# Altium PCB standos_rpi_com.PcbDoc (part 1 of 2)
Units mm, origin at the board's own origin, x right, y up, seen from the top; angles counter-clockwise.
Board outline 197 x 179 mm, 2 copper layers (Top Layer, Bottom Layer); 32 components, 588 nets, 1605 pads, 102 vias.
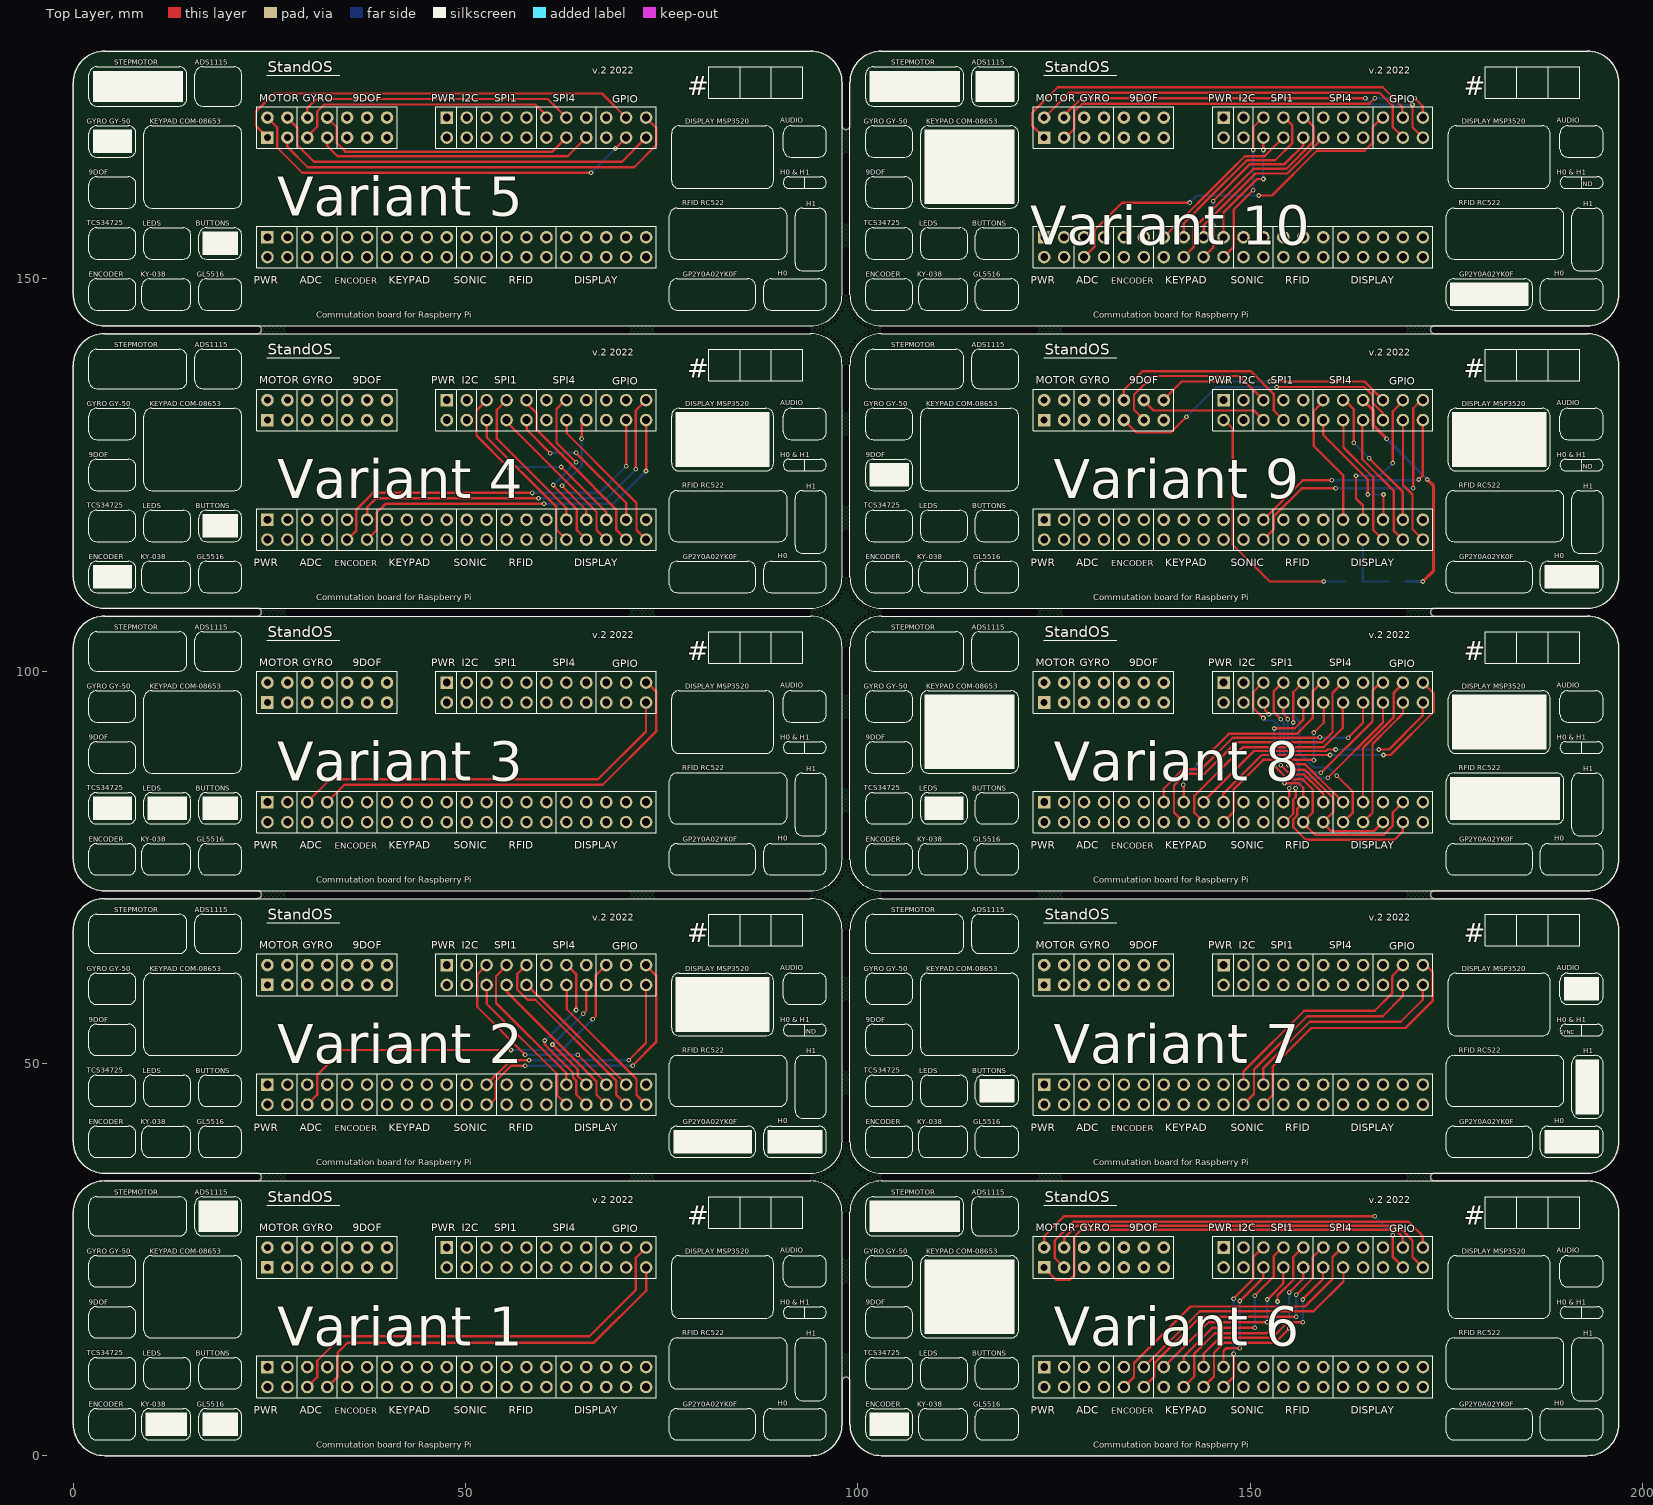
[diagram p0: Top Layer view]
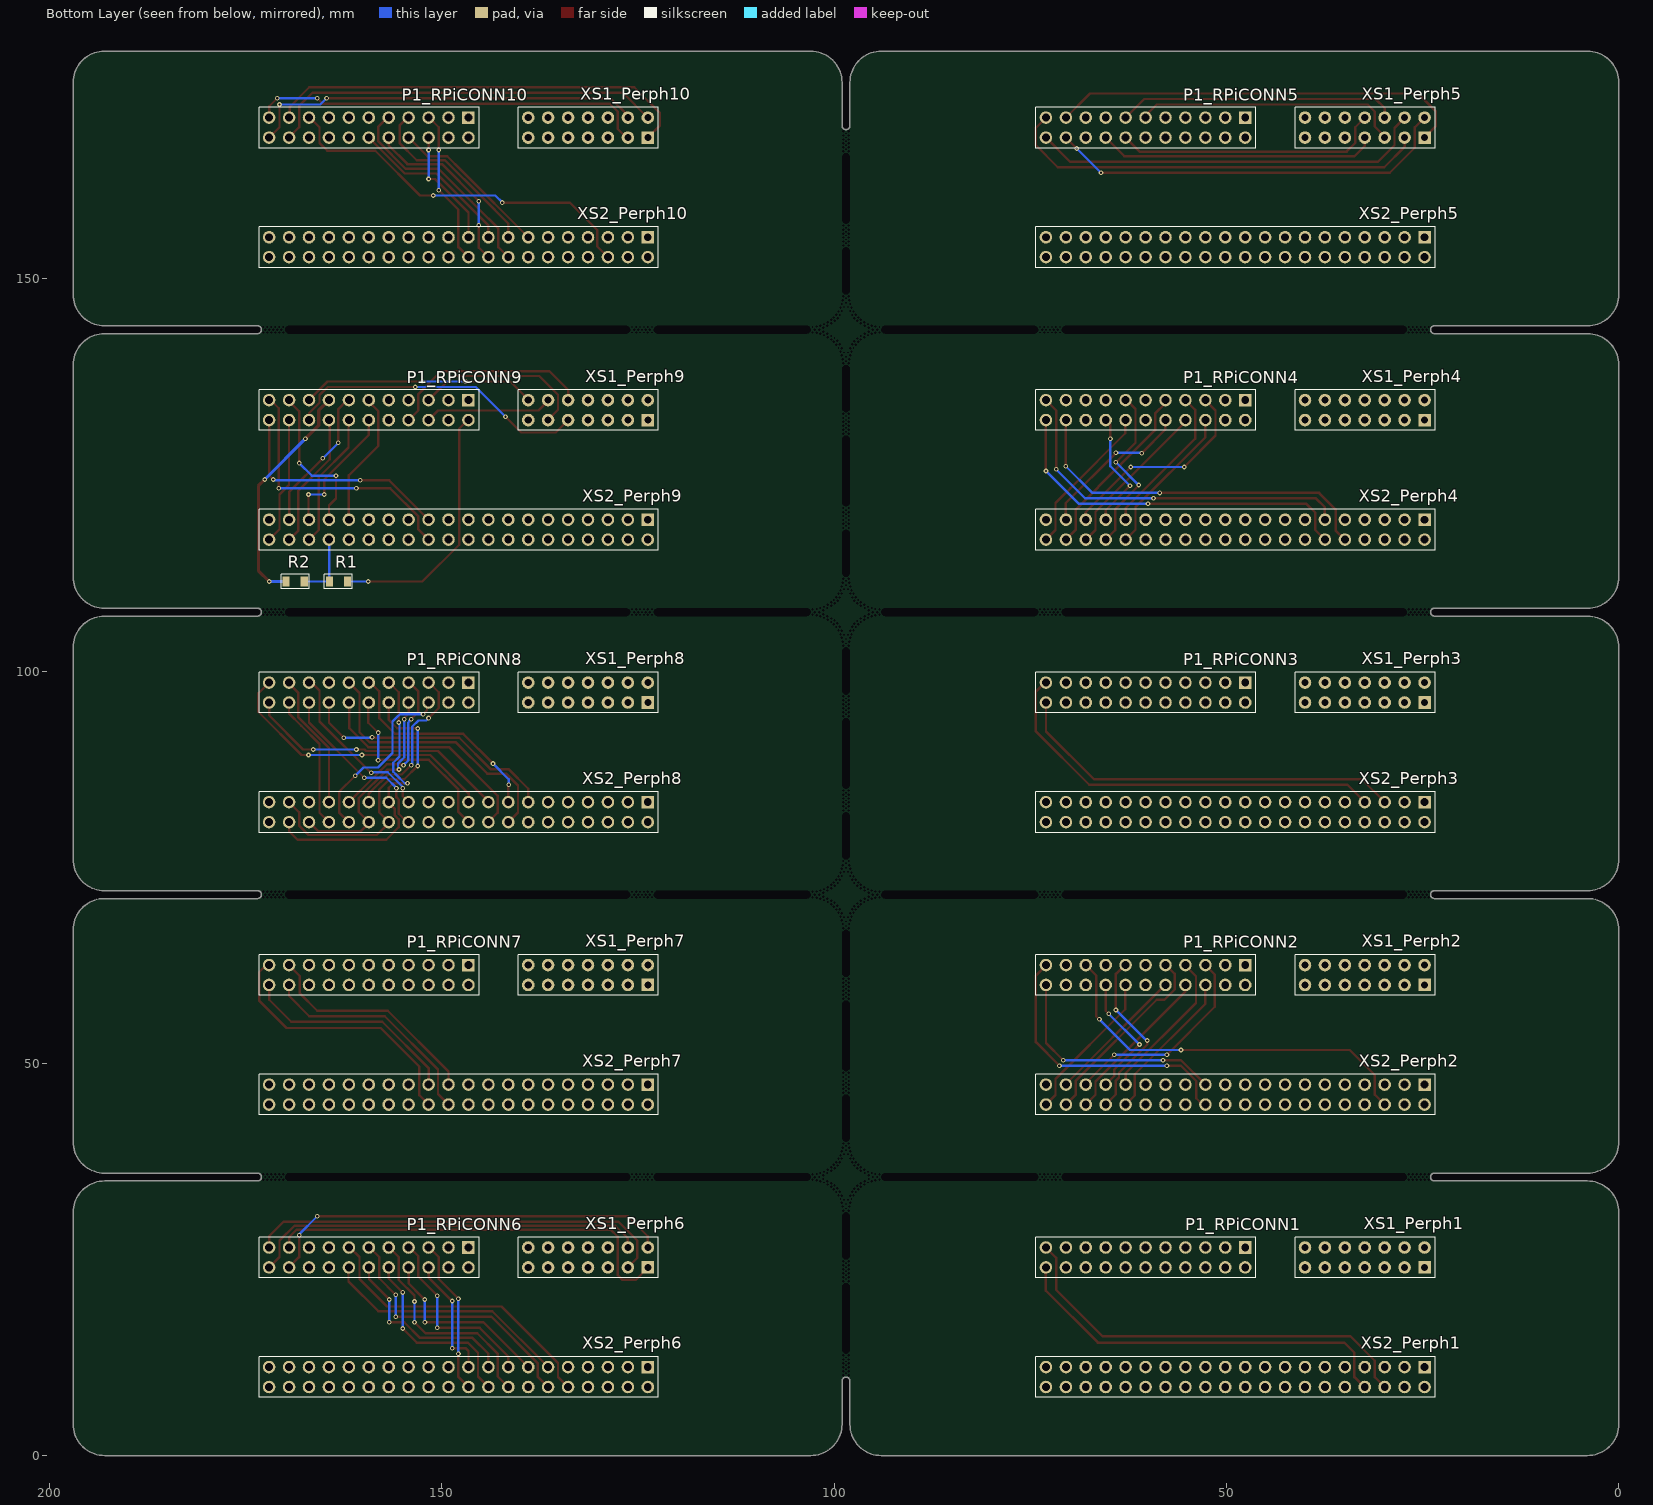
[diagram p1: Bottom Layer view, seen from below]

## Layer stack, top to bottom
Top Solder: solder mask 0.0102, Solder Resist, Dk 3.5
Top Layer: signal copper 0.0356
Dielectric 1: dielectric 0.32, FR-4, Dk 4.8
Bottom Layer: signal copper 0.0356
Bottom Solder: solder mask 0.0102, Solder Resist, Dk 3.5

## Board outline
4,0 cw(c4,4) 0,4 0,31 cw(c4,31) 4,35 23.5,35 ccw(c23.5,35.5) 23.5,36 4,36 cw(c4,40) 0,40 0,67 cw(c4,67) 4,71 23.5,71 ccw(c23.5,71.5) 23.5,72 4,72 cw(c4,76) 0,76 0,103 cw(c4,103) 4,107 23.5,107 ccw(c23.5,107.5) 23.5,108 4,108 cw(c4,112) 0,112 0,139 cw(c4,139) 4,143 23.5,143 ccw(c23.5,143.5) 23.5,144 4,144 cw(c4,148) 0,148 0,175 cw(c4,175) 4,179 94,179 cw(c94,175) 98,175 98,169.5 ccw(c98.5,169.5) 99,169.5 99,175 cw(c103,175) 103,179 193,179 cw(c193,175) 197,175 197,148 cw(c193,148) 193,144 173.5,144 ccw(c173.5,143.5) 173.5,143 193,143 cw(c193,139) 197,139 197,112 cw(c193,112) 193,108 173.5,108 ccw(c173.5,107.5) 173.5,107 193,107 cw(c193,103) 197,103 197,76 cw(c193,76) 193,72 173.5,72 ccw(c173.5,71.5) 173.5,71 193,71 cw(c193,67) 197,67 197,40 cw(c193,40) 193,36 173.5,36 ccw(c173.5,35.5) 173.5,35 193,35 cw(c193,31) 197,31 197,4 cw(c193,4) 193,0 103,0 cw(c103,4) 99,4 99,9.5 ccw(c98.5,9.5) 98,9.5 98,4 cw(c94,4) 94,0

## Design rules (kind name [scope] priority, off if disabled: settings)
Clearance [All] p1: gap=0.2 ignorepadtopadclearanceinfootprint=FALSE except(0: Arc-Hole Track-Hole SMDPad-Hole THPad-Hole Via-Hole Fill-Hole Poly-Hole Region-Hole Text-Hole)
HoleSize [All] p1: absolutevalues=TRUE maxlimit=30 minlimit=0.3 maxpercent=80.000 minpercent=20.000
HoleToHoleClearance [All] p1: gap=0.1 allowstackedmicrovias=TRUE
PolygonConnect [All] p1: connectstyle=Relief reliefconductorwidth=0.254 reliefentries=4 polygonreliefangle="90 Angle" airgapwidth=0.254
RoutingVias [All] p1: holewidth=0.3 width=0.5 viastyle="Through Hole" minholewidth=0.3 minwidth=0.5 maxholewidth=1 maxwidth=1 useviatemplates=TRUE viatemplateguid#1={39C81204-A165-49BB-A1DD-CC813F6DF5A9} viatemplatename#1=v50h30m50
SilkToSilkClearance [All] p1: silktosilkclearance=0.1
SilkToSolderMaskClearance [IsPad] p1: minsilkscreentomaskgap=0.1 clearancetoexposedcopper=TRUE
SolderMaskExpansion [All] p1: expansion=0.102 istentingtop=FALSE
Width [All] p1: maxlimit=2 minlimit=0.2 preferedwidth=0.3 minimp=50.000000 maximp=50.000000 favimp=50.000000
26 further rules are at their usual default settings.

## Classes and differential pairs
component class RPiCONN10: P1_RPiCONN10
component class Perph10: XS1_Perph10 XS2_Perph10
component class "Variant 9": R1 R2
component class RPiCONN9: P1_RPiCONN9
component class RPiCONN8: P1_RPiCONN8
component class RPiCONN7: P1_RPiCONN7
component class RPiCONN6: P1_RPiCONN6
component class RPiCONN5: P1_RPiCONN5
component class RPiCONN4: P1_RPiCONN4
component class Perph9: XS1_Perph9 XS2_Perph9
component class Perph8: XS1_Perph8 XS2_Perph8
component class Perph7: XS1_Perph7 XS2_Perph7
component class Perph6: XS1_Perph6 XS2_Perph6
component class Perph5: XS1_Perph5 XS2_Perph5
component class Perph4: XS1_Perph4 XS2_Perph4
component class RPiCONN3: P1_RPiCONN3
component class RPiCONN1: P1_RPiCONN1
component class RPiCONN2: P1_RPiCONN2
component class Perph3: XS1_Perph3 XS2_Perph3
component class Perph2: XS1_Perph2 XS2_Perph2
channel class RPi_connector: RPiCONN1 RPiCONN2 RPiCONN3 RPiCONN4 RPiCONN5 RPiCONN6 RPiCONN7 RPiCONN8 RPiCONN9
channel class Perph_connectors: Perph1 Perph2 Perph3 Perph4 Perph5 Perph6 Perph7 Perph8 Perph9
component class Perph1: XS1_Perph1 XS2_Perph1

## Components (designator, comment, footprint, x,y, rotation, side; value= is the part's Value field where it differs from the comment)
P1_RPiCONN1 "PLD-22" PLD-22 47.62,26.525 r0 bottom (schematic designator P1)
P1_RPiCONN2 "PLD-22" PLD-22 47.62,62.525 r0 bottom (schematic designator P1)
P1_RPiCONN3 "PLD-22" PLD-22 47.62,98.525 r0 bottom (schematic designator P1)
P1_RPiCONN4 "PLD-22" PLD-22 47.62,134.525 r0 bottom (schematic designator P1)
P1_RPiCONN5 "PLD-22" PLD-22 47.62,170.525 r0 bottom (schematic designator P1)
P1_RPiCONN6 "PLD-22" PLD-22 146.62,26.525 r0 bottom (schematic designator P1)
P1_RPiCONN7 "PLD-22" PLD-22 146.62,62.525 r0 bottom (schematic designator P1)
P1_RPiCONN8 "PLD-22" PLD-22 146.62,98.525 r0 bottom (schematic designator P1)
P1_RPiCONN9 "PLD-22" PLD-22 146.62,134.525 r0 bottom (schematic designator P1)
P1_RPiCONN10 "PLD-22" PLD-22 146.62,170.525 r0 bottom (schematic designator P1)
R1 "R0805" R0805 163.2,111.4 r0 bottom value=10K
R2 "R0805" R0805 168.7,111.4 r0 bottom value=NC
XS1_Perph1 "PLD-14" PBD-14 24.76,26.525 r0 bottom (schematic designator XS1)
XS1_Perph2 "PLD-14" PBD-14 24.76,62.525 r0 bottom (schematic designator XS1)
XS1_Perph3 "PLD-14" PBD-14 24.76,98.525 r0 bottom (schematic designator XS1)
XS1_Perph4 "PLD-14" PBD-14 24.76,134.525 r0 bottom (schematic designator XS1)
XS1_Perph5 "PLD-14" PBD-14 24.76,170.525 r0 bottom (schematic designator XS1)
XS1_Perph6 "PLD-14" PBD-14 123.76,26.525 r0 bottom (schematic designator XS1)
XS1_Perph7 "PLD-14" PBD-14 123.76,62.525 r0 bottom (schematic designator XS1)
XS1_Perph8 "PLD-14" PBD-14 123.76,98.525 r0 bottom (schematic designator XS1)
XS1_Perph9 "PLD-14" PBD-14 123.76,134.525 r0 bottom (schematic designator XS1)
XS1_Perph10 "PLD-14" PBD-14 123.76,170.525 r0 bottom (schematic designator XS1)
XS2_Perph1 "PLD-40" PLD-40 24.76,11.285 r0 bottom (schematic designator XS2)
XS2_Perph2 "PLD-40" PLD-40 24.76,47.285 r0 bottom (schematic designator XS2)
XS2_Perph3 "PLD-40" PLD-40 24.76,83.285 r0 bottom (schematic designator XS2)
XS2_Perph4 "PLD-40" PLD-40 24.76,119.285 r0 bottom (schematic designator XS2)
XS2_Perph5 "PLD-40" PLD-40 24.76,155.285 r0 bottom (schematic designator XS2)
XS2_Perph6 "PLD-40" PLD-40 123.76,11.285 r0 bottom (schematic designator XS2)
XS2_Perph7 "PLD-40" PLD-40 123.76,47.285 r0 bottom (schematic designator XS2)
XS2_Perph8 "PLD-40" PLD-40 123.76,83.285 r0 bottom (schematic designator XS2)
XS2_Perph9 "PLD-40" PLD-40 123.76,119.285 r0 bottom (schematic designator XS2)
XS2_Perph10 "PLD-40" PLD-40 123.76,155.285 r0 bottom (schematic designator XS2)

## Footprints (in the part's own frame and the unit in brackets; to place one, negate y for a bottom-side part, rotate by r counter-clockwise, add the part's x,y. Pads: shape width x height; smd on the part's side, far side on the other; paste and mask are expansions set on the pad)
PBD-14 [mm]
  rect 1.6x1.6 hole 0.9: 1(0,2.54)
  round 1.6 hole 0.9: 2(0,0) 3(2.54,2.54) 4(2.54,0) 5(5.08,2.54) 6(5.08,0) 7(7.62,2.54) 8(7.62,0) 9(10.16,2.54) 10(10.16,0) 11(12.7,2.54) 12(12.7,0) 13(15.24,2.54) 14(15.24,0)
  silkscreen extent -1.36,-1.33 16.51,3.87, body extent -1.27,-1.23 16.51,3.85, height 8.4
PLD-22 [mm]
  rect 1.6x1.6 hole 1: 1(0,0)
  round 1.6 hole 1: 2(0,2.54) 3(2.54,0) 4(2.54,2.54) 5(5.08,0) 6(5.08,2.54) 7(7.62,0) 8(7.62,2.54) 9(10.16,0) 10(10.16,2.54) 11(12.7,0) 12(12.7,2.54) 13(15.24,0) 14(15.24,2.54) 15(17.78,0) 16(17.78,2.54) 17(20.32,0) 18(20.32,2.54) 19(22.86,0) 20(22.86,2.54) 21(25.4,0) 22(25.4,2.54)
  silkscreen extent -1.36,-1.33 26.67,3.87, body extent -1.29,-1.26 26.65,3.82, height 8.54
PLD-40 [mm]
  rect 1.6x1.6 hole 1: 1(0,0)
  round 1.6 hole 1: 2(0,2.54) 3(2.54,0) 4(2.54,2.54) 5(5.08,0) 6(5.08,2.54) 7(7.62,0) 8(7.62,2.54) 9(10.16,0) 10(10.16,2.54) 11(12.7,0) 12(12.7,2.54) 13(15.24,0) 14(15.24,2.54) 15(17.78,0) 16(17.78,2.54) 17(20.32,0) 18(20.32,2.54) 19(22.86,0) 20(22.86,2.54) 21(25.4,0) 22(25.4,2.54) 23(27.94,0) 24(27.94,2.54) 25(30.48,0) 26(30.48,2.54) 27(33.02,0) 28(33.02,2.54) 29(35.56,0) 30(35.56,2.54) 31(38.1,0) 32(38.1,2.54) 33(40.64,0) 34(40.64,2.54) 35(43.18,0) 36(43.18,2.54) 37(45.72,0) 38(45.72,2.54) 39(48.26,0) 40(48.26,2.54)
  silkscreen extent -1.36,-1.33 49.55,3.87, body extent -1.29,-1.26 49.51,3.82, height 8.54
R0805 [mm]
  rect 0.9x1.3 smd: 1(-1.15,0) 2(1.15,0)
  silkscreen extent -1.8,-0.9 1.8,0.9, body extent -1.4,-0.62 1.4,0.63, height 0.8

## Free pads (board coordinates)
  round 0 hole 1 slot 44 at 0 deg unplated: 17(49,35.5) 17(49,71.5) 17(49,107.5) 17(49,143.5) 17(148,35.5) 17(148,71.5) 17(148,107.5) 17(148,143.5)
  round 0 hole 1 slot 20 at 0 deg unplated: 17(84,35.5) 17(84,71.5) 17(84,107.5) 17(84,143.5) 17(113,35.5) 17(113,71.5) 17(113,107.5) 17(113,143.5)
  round 0 hole 1 slot 9 at 90 deg unplated: 17(98.5,17.5) 17(98.5,53.5) 17(98.5,89.5) 17(98.5,125.5) 17(98.5,161.5)
  round 0 hole 1 slot 6 at 90 deg unplated: 17(98.5,28) 17(98.5,43) 17(98.5,64) 17(98.5,79) 17(98.5,100) 17(98.5,115) 17(98.5,136) 17(98.5,151)
  round 0 hole 0.3 unplated mask+0.102: ""(24.225,35.15) ""(24.225,35.85) ""(24.225,71.15) ""(24.225,71.85) ""(24.225,107.15) ""(24.225,107.85) ""(24.225,143.15) ""(24.225,143.85) ""(24.5,35.501) ""(24.5,71.501) ""(24.5,107.501) ""(24.5,143.501) ""(24.75,35.15) ""(24.75,35.85) ""(24.75,71.15) ""(24.75,71.85) ""(24.75,107.15) ""(24.75,107.85) ""(24.75,143.15) ""(24.75,143.85) ""(25,35.501) ""(25,71.501) ""(25,107.501) ""(25,143.501) ""(25.25,35.15) ""(25.25,35.85) ""(25.25,71.15) ""(25.25,71.85) ""(25.25,107.15) ""(25.25,107.85) ""(25.25,143.15) ""(25.25,143.85) ""(25.5,35.501) ""(25.5,71.501) ""(25.5,107.501) ""(25.5,143.501) ""(25.75,35.15) ""(25.75,35.85) ""(25.75,71.15) ""(25.75,71.85) ""(25.75,107.15) ""(25.75,107.85) ""(25.75,143.15) ""(25.75,143.85) ""(26,35.501) ""(26,71.501) ""(26,107.501) ""(26,143.501) ""(26.25,35.15) ""(26.25,35.85) ""(26.25,71.15) ""(26.25,71.85) ""(26.25,107.15) ""(26.25,107.85) ""(26.25,143.15) ""(26.25,143.85) ""(26.5,35.501) ""(26.5,71.501) ""(26.5,107.501) ""(26.5,143.501) ""(26.775,35.15) ""(26.775,35.85) ""(26.775,71.15) ""(26.775,71.85) ""(26.775,107.15) ""(26.775,107.85) ""(26.775,143.15) ""(26.775,143.85) ""(71.225,35.15) ""(71.225,35.85) ""(71.225,71.15) ""(71.225,71.85) ""(71.225,107.15) ""(71.225,107.85) ""(71.225,143.15) ""(71.225,143.85) ""(71.5,35.501) ""(71.5,71.501) ""(71.5,107.501) ""(71.5,143.501) ""(71.75,35.15) ""(71.75,35.85) ""(71.75,71.15) ""(71.75,71.85) ""(71.75,107.15) ""(71.75,107.85) ""(71.75,143.15) ""(71.75,143.85) ""(72,35.501) ""(72,71.501) ""(72,107.501) ""(72,143.501) ""(72.25,35.15) ""(72.25,35.85) ""(72.25,71.15) ""(72.25,71.85) ""(72.25,107.15) ""(72.25,107.85) ""(72.25,143.15) ""(72.25,143.85) ""(72.5,35.501) ""(72.5,71.501) ""(72.5,107.501) ""(72.5,143.501) ""(72.75,35.15) ""(72.75,35.85) ""(72.75,71.15) ""(72.75,71.85) ""(72.75,107.15) ""(72.75,107.85) ""(72.75,143.15) ""(72.75,143.85) ""(73,35.501) ""(73,71.501) ""(73,107.501) ""(73,143.501) ""(73.25,35.15) ""(73.25,35.85) ""(73.25,71.15) ""(73.25,71.85) ""(73.25,107.15) ""(73.25,107.85) ""(73.25,143.15) ""(73.25,143.85) ""(73.5,35.501) ""(73.5,71.501) ""(73.5,107.501) ""(73.5,143.501) ""(73.775,35.15) ""(73.775,35.85) ""(73.775,71.15) ""(73.775,71.85) ""(73.775,107.15) ""(73.775,107.85) ""(73.775,143.15) ""(73.775,143.85) ""(94.225,35.15) ""(94.225,35.85) ""(94.225,71.15) ""(94.225,71.85) ""(94.225,107.15) ""(94.225,107.85) ""(94.225,143.15) ""(94.225,143.85) ""(94.5,35.501) ""(94.5,71.501) ""(94.5,107.501) ""(94.5,143.501) ""(94.75,35.1) ""(94.75,35.9) ""(94.75,71.1) ""(94.75,71.9) ""(94.75,107.1) ""(94.75,107.9) ""(94.75,143.1) ""(94.75,143.9) ""(95.075,35.5) ""(95.075,71.5) ""(95.075,107.5) ""(95.075,143.5) ""(95.225,34.975) ""(95.225,36.025) ""(95.225,70.975) ""(95.225,72.025) ""(95.225,106.975) ""(95.225,108.025) ""(95.225,142.975) ""(95.225,144.025) ""(95.6,35.25) ""(95.6,35.75) ""(95.6,71.25) ""(95.6,71.75) ""(95.6,107.25) ""(95.6,107.75) ""(95.6,143.25) ""(95.6,143.75) ""(95.7,34.8) ""(95.7,36.2) ""(95.7,70.8) ""(95.7,72.2) ""(95.7,106.8) ""(95.7,108.2) ""(95.7,142.8) ""(95.7,144.2) ""(96.125,34.975) ""(96.125,36.025) ""(96.125,70.975) ""(96.125,72.025) ""(96.125,106.975) ""(96.125,108.025) ""(96.125,142.975) ""(96.125,144.025) ""(96.175,34.55) ""(96.175,36.45) ""(96.175,70.55) ""(96.175,72.45) ""(96.175,106.55) ""(96.175,108.45) ""(96.175,142.55) ""(96.175,144.45) ""(96.6,34.25) ""(96.6,36.75) ""(96.6,70.25) ""(96.6,70.25) ""(96.6,72.75) ""(96.6,106.25) ""(96.6,108.75) ""(96.6,142.25) ""(96.6,142.25) ""(96.6,144.75) ""(96.625,34.7) ""(96.625,36.3) ""(96.625,70.7) ""(96.625,72.3) ""(96.625,106.7) ""(96.625,108.3) ""(96.625,142.7) ""(96.625,144.3) ""(96.95,33.95) ""(96.95,37.05) ""(96.95,69.95) ""(96.95,73.05) ""(96.95,105.95) ""(96.95,109.05) ""(96.95,141.95) ""(96.95,145.05) ""(97.075,34.375) ""(97.075,36.625) ""(97.075,70.375) ""(97.075,72.625) ""(97.075,106.375) ""(97.075,108.625) ""(97.075,142.375) ""(97.075,144.625) ""(97.25,33.6) ""(97.25,37.4) ""(97.25,69.6) ""(97.25,73.4) ""(97.25,105.6) ""(97.25,109.4) ""(97.25,141.6) ""(97.25,145.4) ""(97.45,34.025) ""(97.45,36.975) ""(97.45,70.025) ""(97.45,72.975) ""(97.45,106.025) ""(97.45,108.975) ""(97.45,142.025) ""(97.45,144.975) ""(97.55,33.175) ""(97.55,37.825) ""(97.55,69.175) ""(97.55,73.825) ""(97.55,105.175) ""(97.55,109.825) ""(97.55,141.175) ""(97.55,145.825) ""(97.7,33.625) ""(97.7,37.375) ""(97.7,69.625) ""(97.7,73.375) ""(97.7,105.625) ""(97.7,109.375) ""(97.7,141.625) ""(97.7,145.375) ""(97.8,32.7) ""(97.8,38.3) ""(97.8,68.7) ""(97.8,74.3) ""(97.8,104.7) ""(97.8,110.3) ""(97.8,140.7) ""(97.8,146.3) ""(97.975,32.225) ""(97.975,33.125) ""(97.975,37.875) ""(97.975,38.775) ""(97.975,68.225) ""(97.975,69.125) ""(97.975,73.875) ""(97.975,74.775) ""(97.975,104.225) ""(97.975,105.125) ""(97.975,109.875) ""(97.975,110.775) ""(97.975,140.225) ""(97.975,141.125) ""(97.975,145.875) ""(97.975,146.775) ""(98.1,31.75) ""(98.1,39.25) ""(98.1,67.75) ""(98.1,75.25) ""(98.1,103.75) ""(98.1,111.25) ""(98.1,139.75) ""(98.1,147.25) ""(98.15,10.225) ""(98.15,10.75) ""(98.15,11.25) ""(98.15,11.75) ""(98.15,12.25) ""(98.15,12.775) ""(98.15,22.225) ""(98.15,22.75) ""(98.15,23.25) ""(98.15,23.75) ""(98.15,24.25) ""(98.15,24.775) ""(98.15,31.225) ""(98.15,39.775) ""(98.15,46.225) ""(98.15,46.75) ""(98.15,47.25) ""(98.15,47.75) ""(98.15,48.25) ""(98.15,48.775) ""(98.15,58.225) ""(98.15,58.75) ""(98.15,59.25) ""(98.15,59.75) ""(98.15,60.25) ""(98.15,60.775) ""(98.15,67.225) ""(98.15,75.775) ""(98.15,82.225) ""(98.15,82.75) ""(98.15,83.25) ""(98.15,83.75) ""(98.15,84.25) ""(98.15,84.775) ""(98.15,94.225) ""(98.15,94.75) ""(98.15,95.25) ""(98.15,95.75) ""(98.15,96.25) ""(98.15,96.775) ""(98.15,103.225) ""(98.15,111.775) ""(98.15,118.225) ""(98.15,118.75) ""(98.15,119.25) ""(98.15,119.75) ""(98.15,120.25) ""(98.15,120.775) ""(98.15,130.225) ""(98.15,130.75) ""(98.15,131.25) ""(98.15,131.75) ""(98.15,132.25) ""(98.15,132.775) ""(98.15,139.225) ""(98.15,147.775) ""(98.15,154.225) ""(98.15,154.75) ""(98.15,155.25) ""(98.15,155.75) ""(98.15,156.25) ""(98.15,156.775) ""(98.15,166.225) ""(98.15,166.75) ""(98.15,167.25) ""(98.15,167.75) ""(98.15,168.25) ""(98.15,168.775) ""(98.25,32.6) ""(98.25,38.4) ""(98.25,68.6) ""(98.25,74.4) ""(98.25,104.6) ""(98.25,110.4) ""(98.25,140.6) ""(98.25,146.4) ""(98.499,10.5) ""(98.499,11) ""(98.499,11.5) ""(98.499,12) ""(98.499,12.5) ""(98.499,22.5) ""(98.499,23) ""(98.499,23.5) ""(98.499,24) ""(98.499,24.5) ""(98.499,31.5) ""(98.499,39.5) ""(98.499,46.5) ""(98.499,47) ""(98.499,47.5) ""(98.499,48) ""(98.499,48.5) ""(98.499,58.5) ""(98.499,59) ""(98.499,59.5) ""(98.499,60) ""(98.499,60.5) ""(98.499,67.5) ""(98.499,75.5) ""(98.499,82.5) ""(98.499,83) ""(98.499,83.5) ""(98.499,84) ""(98.499,84.5) ""(98.499,94.5) ""(98.499,95) ""(98.499,95.5) ""(98.499,96) ""(98.499,96.5) ""(98.499,103.5) ""(98.499,111.5) ""(98.499,118.5) ""(98.499,119) ""(98.499,119.5) ""(98.499,120) ""(98.499,120.5) ""(98.499,130.5) ""(98.499,131) ""(98.499,131.5) ""(98.499,132) ""(98.499,132.5) ""(98.499,139.5) ""(98.499,147.5) ""(98.499,154.5) ""(98.499,155) ""(98.499,155.5) ""(98.499,156) ""(98.499,156.5) ""(98.499,166.5) ""(98.499,167) ""(98.499,167.5) ""(98.499,168) ""(98.499,168.5) ""(98.5,32.075) ""(98.5,38.925) ""(98.5,68.075) ""(98.5,74.925) ""(98.5,104.075) ""(98.5,110.925) ""(98.5,140.075) ""(98.5,146.925) ""(98.75,32.6) ""(98.75,38.4) ""(98.75,68.6) ""(98.75,74.4) ""(98.75,104.6) ""(98.75,110.4) ""(98.75,140.6) ""(98.75,146.4) ""(98.85,10.225) ""(98.85,10.75) ""(98.85,11.25) ""(98.85,11.75) ""(98.85,12.25) ""(98.85,12.775) ""(98.85,22.225) ""(98.85,22.75) ""(98.85,23.25) ""(98.85,23.75) ""(98.85,24.25) ""(98.85,24.775) ""(98.85,46.225) ""(98.85,46.75) ""(98.85,47.25) ""(98.85,47.75) ""(98.85,48.25) ""(98.85,48.775) ""(98.85,58.225) ""(98.85,58.75) ""(98.85,59.25) ""(98.85,59.75) ""(98.85,60.25) ""(98.85,60.775) ""(98.85,82.225) ""(98.85,82.75) ""(98.85,83.25) ""(98.85,83.75) ""(98.85,84.25) ""(98.85,84.775) ""(98.85,94.225) ""(98.85,94.75) ""(98.85,95.25) ""(98.85,95.75) ""(98.85,96.25) ""(98.85,96.775) ""(98.85,118.225) ""(98.85,118.75) ""(98.85,119.25) ""(98.85,119.75) ""(98.85,120.25) ""(98.85,120.775) ""(98.85,130.225) ""(98.85,130.75) ""(98.85,131.25) ""(98.85,131.75) ""(98.85,132.25) ""(98.85,132.775) ""(98.85,154.225) ""(98.85,154.75) ""(98.85,155.25) ""(98.85,155.75) ""(98.85,156.25) ""(98.85,156.775) ""(98.85,166.225) ""(98.85,166.75) ""(98.85,167.25) ""(98.85,167.75) ""(98.85,168.25) ""(98.85,168.775) ""(98.85,31.225) ""(98.85,39.775) ""(98.85,67.225) ""(98.85,75.775) ""(98.85,103.225) ""(98.85,111.775) ""(98.85,139.225) ""(98.85,147.775) ""(98.9,31.75) ""(98.9,39.25) ""(98.9,67.75) ""(98.9,75.25) ""(98.9,103.75) ""(98.9,111.25) ""(98.9,139.75) ""(98.9,147.25) ""(99.025,32.225) ""(99.025,33.125) ""(99.025,37.875) ""(99.025,38.775) ""(99.025,68.225) ""(99.025,69.125) ""(99.025,73.875) ""(99.025,74.775) ""(99.025,104.225) ""(99.025,105.125) ""(99.025,109.875) ""(99.025,110.775) ""(99.025,140.225) ""(99.025,141.125) ""(99.025,145.875) ""(99.025,146.775) ""(99.2,32.7) ""(99.2,38.3) ""(99.2,68.7) ""(99.2,74.3) ""(99.2,104.7) ""(99.2,110.3) ""(99.2,140.7) ""(99.2,146.3) ""(99.3,33.625) ""(99.3,37.375) ""(99.3,69.625) ""(99.3,73.375) ""(99.3,105.625) ""(99.3,109.375) ""(99.3,141.625) ""(99.3,145.375) ""(99.45,33.175) ""(99.45,37.825) ""(99.45,69.175) ""(99.45,73.825) ""(99.45,105.175) ""(99.45,109.825) ""(99.45,141.175) ""(99.45,145.825) ""(99.55,36.975) ""(99.55,72.975) ""(99.55,108.975) ""(99.55,144.975) ""(99.625,34.075) ""(99.625,70.075) ""(99.625,106.075) ""(99.625,142.075) ""(99.75,33.6) ""(99.75,37.4) ""(99.75,69.6) ""(99.75,73.4) ""(99.75,105.6) ""(99.75,109.4) ""(99.75,141.6) ""(99.75,145.4) ""(99.925,36.625) ""(99.925,72.625) ""(99.925,108.625) ""(99.925,144.625) ""(99.975,34.45) ""(99.975,70.45) ""(99.975,106.45) ""(99.975,142.45) ""(100.05,33.95) ""(100.05,37.05) ""(100.05,69.95) ""(100.05,73.05) ""(100.05,105.95) ""(100.05,109.05) ""(100.05,141.95) ""(100.05,145.05) ""(100.375,36.3) ""(100.375,72.3) ""(100.375,108.3) ""(100.375,144.3) ""(100.375,34.7) ""(100.375,70.7) ""(100.375,106.7) ""(100.375,142.7) ""(100.4,36.75) ""(100.4,72.75) ""(100.4,108.75) ""(100.4,144.75) ""(100.4,34.25) ""(100.4,70.25) ""(100.4,106.25) ""(100.4,142.25) ""(100.825,36.45) ""(100.825,72.45) ""(100.825,108.45) ""(100.825,144.45) ""(100.825,34.55) ""(100.825,70.55) ""(100.825,106.55) ""(100.825,142.55) ""(100.875,36.025) ""(100.875,72.025) ""(100.875,108.025) ""(100.875,144.025) ""(100.875,34.975) ""(100.875,70.975) ""(100.875,106.975) ""(100.875,142.975) ""(101.3,36.2) ""(101.3,72.2) ""(101.3,108.2) ""(101.3,144.2) ""(101.3,34.8) ""(101.3,70.8) ""(101.3,106.8) ""(101.3,142.8) ""(101.4,35.75) ""(101.4,71.75) ""(101.4,107.75) ""(101.4,143.75) ""(101.4,35.25) ""(101.4,71.25) ""(101.4,107.25) ""(101.4,143.25) ""(101.775,36.025) ""(101.775,72.025) ""(101.775,108.025) ""(101.775,144.025) ""(101.775,34.975) ""(101.775,70.975) ""(101.775,106.975) ""(101.775,142.975) ""(101.925,35.5) ""(101.925,71.5) ""(101.925,107.5) ""(101.925,143.5) ""(102.25,35.9) ""(102.25,71.9) ""(102.25,107.9) ""(102.25,143.9) ""(102.25,35.1) ""(102.25,71.1) ""(102.25,107.1) ""(102.25,143.1) ""(102.5,35.499) ""(102.5,71.499) ""(102.5,107.499) ""(102.5,143.499) ""(102.775,35.85) ""(102.775,71.85) ""(102.775,107.85) ""(102.775,143.85) ""(102.775,35.15) ""(102.775,71.15) ""(102.775,107.15) ""(102.775,143.15) ""(123.225,35.15) ""(123.225,35.85) ""(123.225,71.15) ""(123.225,71.85) ""(123.225,107.15) ""(123.225,107.85) ""(123.225,143.15) ""(123.225,143.85) ""(123.5,35.501) ""(123.5,71.501) ""(123.5,107.501) ""(123.5,143.501) ""(123.75,35.15) ""(123.75,35.85) ""(123.75,71.15) ""(123.75,71.85) ""(123.75,107.15) ""(123.75,107.85) ""(123.75,143.15) ""(123.75,143.85) ""(124,35.501) ""(124,71.501) ""(124,107.501) ""(124,143.501) ""(124.25,35.15) ""(124.25,35.85) ""(124.25,71.15) ""(124.25,71.85) ""(124.25,107.15) ""(124.25,107.85) ""(124.25,143.15) ""(124.25,143.85) ""(124.5,35.501) ""(124.5,71.501) ""(124.5,107.501) ""(124.5,143.501) ""(124.75,35.15) ""(124.75,35.85) ""(124.75,71.15) ""(124.75,71.85) ""(124.75,107.15) ""(124.75,107.85) ""(124.75,143.15) ""(124.75,143.85) ""(125,35.501) ""(125,71.501) ""(125,107.501) ""(125,143.501) ""(125.25,35.15) ""(125.25,35.85) ""(125.25,71.15) ""(125.25,71.85) ""(125.25,107.15) ""(125.25,107.85) ""(125.25,143.15) ""(125.25,143.85) ""(125.5,35.501) ""(125.5,71.501) ""(125.5,107.501) ""(125.5,143.501) ""(125.775,35.15) ""(125.775,35.85) ""(125.775,71.15) ""(125.775,71.85) ""(125.775,107.15) ""(125.775,107.85) ""(125.775,143.15) ""(125.775,143.85) ""(170.225,35.15) ""(170.225,35.85) ""(170.225,71.15) ""(170.225,71.85) ""(170.225,107.15) ""(170.225,107.85) ""(170.225,143.15) ""(170.225,143.85) ""(170.5,35.501) ""(170.5,71.501) ""(170.5,107.501) ""(170.5,143.501) ""(170.75,35.15) ""(170.75,35.85) ""(170.75,71.15) ""(170.75,71.85) ""(170.75,107.15) ""(170.75,107.85) ""(170.75,143.15) ""(170.75,143.85) ""(171,35.501) ""(171,71.501) ""(171,107.501) ""(171,143.501) ""(171.25,35.15) ""(171.25,35.85) ""(171.25,71.15) ""(171.25,71.85) ""(171.25,107.15) ""(171.25,107.85) ""(171.25,143.15) ""(171.25,143.85) ""(171.5,35.501) ""(171.5,71.501) ""(171.5,107.501) ""(171.5,143.501) ""(171.75,35.15) ""(171.75,35.85) ""(171.75,71.15) ""(171.75,71.85) ""(171.75,107.15) ""(171.75,107.85) ""(171.75,143.15) ""(171.75,143.85) ""(172,35.501) ""(172,71.501) ""(172,107.501) ""(172,143.501) ""(172.25,35.15) ""(172.25,35.85) ""(172.25,71.15) ""(172.25,71.85) ""(172.25,107.15) ""(172.25,107.85) ""(172.25,143.15) ""(172.25,143.85) ""(172.5,35.501) ""(172.5,71.501) ""(172.5,107.501) ""(172.5,143.501) ""(172.775,35.15) ""(172.775,35.85) ""(172.775,71.15) ""(172.775,71.85) ""(172.775,107.15) ""(172.775,107.85) ""(172.775,143.15) ""(172.775,143.85)

## Via types
v1: diameter 0.6, hole 0.3, Top Layer to Bottom Layer, 102 vias

## Nets (pads, with @x,y where several pads share a name; then routed paths per layer and width w, separated by ;. In a path a pad name is that pad's centre, name@x,y a point inside that pad or via, vN(x,y) a via of type N, cw(c..) or ccw(c..) an arc to the next point about the centre after c; other vN are vias at no path point)
3V3?: P1_RPiCONN9.2 R1.1 | length 32.7
  Top Layer w0.3: P1_RPiCONN9.2@146.6,132.1 147.8,130.9 147.8,116.1 152.5,111.4 v1(159.4,111.4)
  Bottom Layer w0.3: v1(159.4,111.4) R1.1@162.05,111.4
9DOF.GYR.INT_Perph1: XS1_Perph1.9
9DOF.GYR.INT_Perph2: XS1_Perph2.9
9DOF.GYR.INT_Perph3: XS1_Perph3.9
9DOF.GYR.INT_Perph4: XS1_Perph4.9
9DOF.GYR.INT_Perph5: XS1_Perph5.9
9DOF.GYR.INT_Perph6: XS1_Perph6.9
9DOF.GYR.INT_Perph7: XS1_Perph7.9
9DOF.GYR.INT_Perph8: XS1_Perph8.9
9DOF.GYR.INT_Perph9: P1_RPiCONN9.18 XS1_Perph9.9 | length 38.9
  Top Layer w0.3: XS1_Perph9.9@133.9,132 135.5,130.4 139.9,130.4 v1(141.9,132.4) ; v1(153.4,136.2) 164.558,136.2 165.6,135.158 165.6,134.2 166.94,132.86 P1_RPiCONN9.18@166.94,131.985
  Bottom Layer w0.3: v1(141.9,132.4) 145.7,136.2 v1(153.4,136.2)
9DOF.GYR.INT_Perph10: XS1_Perph10.9
9DOF.GYR.RDY_Perph1: XS1_Perph1.10
9DOF.GYR.RDY_Perph2: XS1_Perph2.10
9DOF.GYR.RDY_Perph3: XS1_Perph3.10
9DOF.GYR.RDY_Perph4: XS1_Perph4.10
9DOF.GYR.RDY_Perph5: XS1_Perph5.10
9DOF.GYR.RDY_Perph6: XS1_Perph6.10
9DOF.GYR.RDY_Perph7: XS1_Perph7.10
9DOF.GYR.RDY_Perph8: XS1_Perph8.10
9DOF.GYR.RDY_Perph9: P1_RPiCONN9.8 XS1_Perph9.10 | length 26.4
  Top Layer w0.3: XS1_Perph9.10@133.9,134.5 133.9,135.8 136.3,138.2 150.1,138.2 153,135.3 153,133.225 P1_RPiCONN9.8@154.24,131.985
9DOF.GYR.RDY_Perph10: XS1_Perph10.10
9DOF.LSM.DRDY_Perph1: XS1_Perph1.14
9DOF.LSM.DRDY_Perph2: XS1_Perph2.14
9DOF.LSM.DRDY_Perph3: XS1_Perph3.14
9DOF.LSM.DRDY_Perph4: XS1_Perph4.14
9DOF.LSM.DRDY_Perph5: XS1_Perph5.14
9DOF.LSM.DRDY_Perph6: XS1_Perph6.14
9DOF.LSM.DRDY_Perph7: XS1_Perph7.14
9DOF.LSM.DRDY_Perph8: XS1_Perph8.14
9DOF.LSM.DRDY_Perph9: P1_RPiCONN9.17 XS1_Perph9.14 | length 29.9
  Top Layer w0.3: XS1_Perph9.14@139,134.6 141.3,136.9 v1(147,136.9) ; v1(152.5,136.9) 164.565,136.9 P1_RPiCONN9.17@166.94,134.525
  Bottom Layer w0.3: v1(147,136.9) v1(152.5,136.9)
9DOF.LSM.DRDY_Perph10: XS1_Perph10.14
9DOF.LSM.INT1_Perph1: XS1_Perph1.11
9DOF.LSM.INT1_Perph2: XS1_Perph2.11
9DOF.LSM.INT1_Perph3: XS1_Perph3.11
9DOF.LSM.INT1_Perph4: XS1_Perph4.11
9DOF.LSM.INT1_Perph5: XS1_Perph5.11
9DOF.LSM.INT1_Perph6: XS1_Perph6.11
9DOF.LSM.INT1_Perph7: XS1_Perph7.11
9DOF.LSM.INT1_Perph8: XS1_Perph8.11
9DOF.LSM.INT1_Perph9: P1_RPiCONN9.5 XS1_Perph9.11 | length 22.5
  Top Layer w0.3: XS1_Perph9.11@136.5,132 135.2,133.3 135.2,135.2 137.6,137.6 148.625,137.6 P1_RPiCONN9.5@151.7,134.525
9DOF.LSM.INT1_Perph10: XS1_Perph10.11
9DOF.LSM.INT2_Perph1: XS1_Perph1.12
9DOF.LSM.INT2_Perph2: XS1_Perph2.12
9DOF.LSM.INT2_Perph3: XS1_Perph3.12
9DOF.LSM.INT2_Perph4: XS1_Perph4.12
9DOF.LSM.INT2_Perph5: XS1_Perph5.12
9DOF.LSM.INT2_Perph6: XS1_Perph6.12
9DOF.LSM.INT2_Perph7: XS1_Perph7.12
9DOF.LSM.INT2_Perph8: XS1_Perph8.12
9DOF.LSM.INT2_Perph9: P1_RPiCONN9.6 XS1_Perph9.12 | length 16.3
  Top Layer w0.3: XS1_Perph9.12@136.4,134.5 137.7,133.2 150.485,133.2 P1_RPiCONN9.6@151.7,131.985
9DOF.LSM.INT2_Perph10: XS1_Perph10.12
ADC.ALRT_Perph1: P1_RPiCONN1.21 XS2_Perph1.6 | length 54.1
  Top Layer w0.3: XS2_Perph1.6@29.84,8.745 31.1,10.005 31.1,12.1 34.2,15.2 65.8,15.2 71.7,21.1 71.7,25.2 P1_RPiCONN1.21@73,26.5
ADC.ALRT_Perph2: P1_RPiCONN2.17 XS2_Perph2.6 | length 50.1
  Top Layer w0.3: XS2_Perph2.6@29.84,44.745 31.1,46.005 31.1,48.5 34.3,51.7 v1(55.8,51.7) ; v1(66.2,55.6) 66.6,56 66.6,61.2 P1_RPiCONN2.17@68,62.6
  Bottom Layer w0.3: v1(55.8,51.7) 62.3,51.7 v1(66.2,55.6)
ADC.ALRT_Perph3: XS2_Perph3.6
ADC.ALRT_Perph4: XS2_Perph4.6
ADC.ALRT_Perph5: XS2_Perph5.6
ADC.ALRT_Perph6: XS2_Perph6.6
ADC.ALRT_Perph7: XS2_Perph7.6
ADC.ALRT_Perph8: XS2_Perph8.6
ADC.ALRT_Perph9: XS2_Perph9.6
ADC.ALRT_Perph10: P1_RPiCONN10.17 XS2_Perph10.6 | length 47.7
  Top Layer w0.3: XS2_Perph10.6@128.84,152.745 130.2,154.105 130.2,156.2 133.7,159.7 v1(142.3,159.7) ; v1(151.1,160.6) 152.8,160.6 158.5,166.3 164.6,166.3 165.6,167.3 165.6,169.3 P1_RPiCONN10.17@166.8,170.5
  Bottom Layer w0.3: v1(142.3,159.7) 143.2,160.6 v1(151.1,160.6)
CLRSENS.INT_Perph1: XS2_Perph1.5
CLRSENS.INT_Perph2: XS2_Perph2.5
CLRSENS.INT_Perph3: P1_RPiCONN3.22 XS2_Perph3.5 | length 50.6
  Top Layer w0.3: XS2_Perph3.5@29.84,83.285 32.755,86.2 66.9,86.2 73,92.3 P1_RPiCONN3.22@73,96
CLRSENS.INT_Perph4: XS2_Perph4.5
CLRSENS.INT_Perph5: XS2_Perph5.5
CLRSENS.INT_Perph6: XS2_Perph6.5
CLRSENS.INT_Perph7: XS2_Perph7.5
CLRSENS.INT_Perph8: XS2_Perph8.5
CLRSENS.INT_Perph9: XS2_Perph9.5
CLRSENS.INT_Perph10: XS2_Perph10.5
CLRSENS.LED_Perph1: XS2_Perph1.7
CLRSENS.LED_Perph2: XS2_Perph2.7
CLRSENS.LED_Perph3: P1_RPiCONN3.21 XS2_Perph3.7 | length 52.5
  Top Layer w0.3: XS2_Perph3.7@32.38,83.285 34.595,85.5 67.5,85.5 74.3,92.3 74.3,97.4 P1_RPiCONN3.21@73.1,98.6
CLRSENS.LED_Perph4: XS2_Perph4.7
CLRSENS.LED_Perph5: XS2_Perph5.7
CLRSENS.LED_Perph6: XS2_Perph6.7
CLRSENS.LED_Perph7: XS2_Perph7.7
CLRSENS.LED_Perph8: XS2_Perph8.7
CLRSENS.LED_Perph9: XS2_Perph9.7
CLRSENS.LED_Perph10: XS2_Perph10.7
DISPLAY.LCD.DC/RS_Perph1: XS2_Perph1.33
DISPLAY.LCD.DC/RS_Perph2: P1_RPiCONN2.16 XS2_Perph2.33 | length 16.3
  Top Layer w0.3: v1(61.09,52.39) 61.1,52.4 64.3,49.2 64.3,48.385 XS2_Perph2.33@65.4,47.285 ; v1(65,56.3) 65.4,56.7 P1_RPiCONN2.16@65.4,59.985
  Bottom Layer w0.3: v1(61.09,52.39) 61.1,52.4 v1(65,56.3)
DISPLAY.LCD.DC/RS_Perph3: XS2_Perph3.33
DISPLAY.LCD.DC/RS_Perph4: P1_RPiCONN4.16 XS2_Perph4.33 | length 15.3
  Top Layer w0.3: v1(62.3,123.6) 65.4,120.5 XS2_Perph4.33@65.4,119.285 ; v1(64.8,129.6) 64.8,131.4 P1_RPiCONN4.16@65.4,132
  Bottom Layer w0.3: v1(62.3,123.6) 64.8,126.1 v1(64.8,129.6)
DISPLAY.LCD.DC/RS_Perph5: XS2_Perph5.33
DISPLAY.LCD.DC/RS_Perph6: XS2_Perph6.33
DISPLAY.LCD.DC/RS_Perph7: XS2_Perph7.33
DISPLAY.LCD.DC/RS_Perph8: P1_RPiCONN8.19 XS2_Perph8.33 | length 17.2
  Top Layer w0.3: XS2_Perph8.33@164.4,83.285 164.4,90.193 167.44,93.233 168.3,94.093 168.3,97.2 P1_RPiCONN8.19@169.5,98.4
DISPLAY.LCD.DC/RS_Perph9: P1_RPiCONN9.19 XS2_Perph9.33 | length 19.9
  Top Layer w0.3: v1(163.5,124.9) 163.5,122 164.4,121.1 XS2_Perph9.33@164.4,119.285 ; v1(168.2,126.5) 168.2,133.1 P1_RPiCONN9.19@169.6,134.5
  Bottom Layer w0.3: v1(163.5,124.9) 166.6,124.9 v1(168.2,126.5)
DISPLAY.LCD.DC/RS_Perph10: XS2_Perph10.33
DISPLAY.LCD.RESET_Perph1: XS2_Perph1.34
DISPLAY.LCD.RESET_Perph2: P1_RPiCONN2.13 XS2_Perph2.34 | length 22.3
  Top Layer w0.3: v1(60.1,52.9) 60.1,52.4 60.2,52.3 63.7,48.8 63.7,48.2 64.1,47.8 64.1,46.045 XS2_Perph2.34@65.4,44.745 ; P1_RPiCONN2.13@62.9,62.6 64.1,61.4 v1(64.1,56.8)
  Bottom Layer w0.3: v1(60.1,52.9) 60.2,52.9 v1(64.1,56.8)
DISPLAY.LCD.RESET_Perph3: XS2_Perph3.34
DISPLAY.LCD.RESET_Perph4: P1_RPiCONN4.13 XS2_Perph4.34 | length 22.2
  Top Layer w0.3: v1(61.2,123.7) 61.2,123.6 64.2,120.6 64.2,117.945 XS2_Perph4.34@65.4,116.745 ; P1_RPiCONN4.13@62.7,134.5 61.6,133.4 61.6,129.1 64.1,126.6 v1(64.11,126.61)
  Bottom Layer w0.3: v1(61.2,123.7) 64.1,126.6 v1(64.11,126.61)
DISPLAY.LCD.RESET_Perph5: XS2_Perph5.34
DISPLAY.LCD.RESET_Perph6: XS2_Perph6.34
DISPLAY.LCD.RESET_Perph7: XS2_Perph7.34
DISPLAY.LCD.RESET_Perph8: P1_RPiCONN8.20 XS2_Perph8.34 | length 17.3
  Top Layer w0.3: XS2_Perph8.34@164.4,80.745 165.6,81.945 165.6,90.686 167.94,93.026 169.5,94.586 P1_RPiCONN8.20@169.5,95.9
DISPLAY.LCD.RESET_Perph9: R1.2 R2.1 XS2_Perph9.34 | length 8.7
  Bottom Layer w0.3: XS2_Perph9.34@164.3,116.8 164.35,116.75 R1.2@164.35,111.4 167.55,111.4 R2.1@167.6,111.4
DISPLAY.LCD.RESET_Perph10: XS2_Perph10.34
DISPLAY.LCD.SPI.MISO_Perph1: XS2_Perph1.37
DISPLAY.LCD.SPI.MISO_Perph2: P1_RPiCONN2.10 XS2_Perph2.37 | length 17.8
  Top Layer w0.3: P1_RPiCONN2.10@57.9,59.9 58.6,59.2 70.48,47.32 XS2_Perph2.37@70.48,47.285
DISPLAY.LCD.SPI.MISO_Perph3: XS2_Perph3.37
DISPLAY.LCD.SPI.MISO_Perph4: P1_RPiCONN4.10 XS2_Perph4.37 | length 19.8
  Top Layer w0.3: P1_RPiCONN4.10@57.8,131.9 57.8,130.764 v1(60.792,127.772) ; v1(64.1,127.8) 70.48,121.42 XS2_Perph4.37@70.48,119.285
  Bottom Layer w0.3: v1(60.792,127.772) 60.82,127.8 v1(64.1,127.8)
DISPLAY.LCD.SPI.MISO_Perph5: XS2_Perph5.37
DISPLAY.LCD.SPI.MISO_Perph6: XS2_Perph6.37
DISPLAY.LCD.SPI.MISO_Perph7: XS2_Perph7.37
DISPLAY.LCD.SPI.MISO_Perph8: P1_RPiCONN8.10 XS2_Perph8.28 XS2_Perph8.37 | length 38.1
  Top Layer w0.3: v1(153.1,87.9) 154.8,86.2 156.7,86.2 158,84.9 158,81.965 XS2_Perph8.28@156.78,80.745 ; v1(153.1,92.681) 153.1,92.7 155.7,92.7 156.8,93.8 P1_RPiCONN8.10@156.8,96 ; XS2_Perph8.28@156.7,80.7 158.3,79.1 161.172,79.1 161.177,79.095 162.543,79.095 162.548,79.1 163.712,79.1 163.717,79.095 165.083,79.095 165.088,79.1 167,79.1 168.2,80.3 168.2,82.005 XS2_Perph8.37@169.48,83.285
  Bottom Layer w0.3: v1(153.1,87.9) v1(153.1,92.681)
DISPLAY.LCD.SPI.MISO_Perph9: P1_RPiCONN9.13 XS2_Perph9.37 | length 18.5
  Top Layer w0.3: P1_RPiCONN9.13@161.86,134.525 162.075,134.525 163.2,133.4 v1(163.2,129.1) ; v1(165.2,127.1) 169.48,122.82 XS2_Perph9.37@169.48,119.285
  Bottom Layer w0.3: v1(163.2,129.1) v1(165.2,127.1)
DISPLAY.LCD.SPI.MISO_Perph10: XS2_Perph10.37
DISPLAY.LCD.SPI.MOSI_Perph1: XS2_Perph1.38
DISPLAY.LCD.SPI.MOSI_Perph2: P1_RPiCONN2.9 XS2_Perph2.38 | length 24.5
  Top Layer w0.3: P1_RPiCONN2.9@57.7,62.5 56.6,61.4 56.6,59.407 57.907,58.1 58.9,58.1 69.2,47.8 69.2,46.025 XS2_Perph2.38@70.48,44.745
DISPLAY.LCD.SPI.MOSI_Perph3: XS2_Perph3.38
DISPLAY.LCD.SPI.MOSI_Perph4: P1_RPiCONN4.9 XS2_Perph4.38 | length 23
  Top Layer w0.3: P1_RPiCONN4.9@57.8,134.5 57.8,134.1 59.1,132.8 59.1,130.7 63.5,126.3 69.2,120.6 69.2,118.025 XS2_Perph4.38@70.48,116.745
DISPLAY.LCD.SPI.MOSI_Perph5: XS2_Perph5.38
DISPLAY.LCD.SPI.MOSI_Perph6: XS2_Perph6.38
DISPLAY.LCD.SPI.MOSI_Perph7: XS2_Perph7.38
DISPLAY.LCD.SPI.MOSI_Perph8: P1_RPiCONN8.9 XS2_Perph8.27 XS2_Perph8.38 | length 39
  Top Layer w0.3: v1(154.394,85.692) 154.4,85.698 154.4,85.7 156.2,85.7 156.78,85.12 XS2_Perph8.27@156.78,83.285 ; v1(155.488,93.441) 155.487,93.443 155.491,93.446 155.467,93.47 155.45,93.47 155.44,93.47 155.405,93.505 155.5,93.6 155.5,97.3 P1_RPiCONN8.9@156.7,98.5 ; XS2_Perph8.27@156.7,83.1 156,82.4 156,81.593 155.5,81.093 155.5,80.1 157.1,78.5 168.4,78.5 169.48,79.58 XS2_Perph8.38@169.48,80.745
  Bottom Layer w0.3: v1(154.394,85.692) 154.4,85.698 154.4,85.7 154.749,85.7 155.849,86.8 156.2,87.151 156.2,87.893 156.2,88.307 155.4,89.107 155.4,93.47 155.44,93.47 155.45,93.47 155.467,93.47 155.491,93.446 155.487,93.443 v1(155.488,93.441)
DISPLAY.LCD.SPI.MOSI_Perph9: P1_RPiCONN9.16 XS2_Perph9.38 | length 17.4
  Top Layer w0.3: P1_RPiCONN9.16@164.3,132 164.3,127 168.3,123 168.3,117.925 XS2_Perph9.38@169.48,116.745
DISPLAY.LCD.SPI.MOSI_Perph10: XS2_Perph10.38
DISPLAY.LCD.SPI.nCE_Perph1: XS2_Perph1.31
DISPLAY.LCD.SPI.nCE_Perph2: P1_RPiCONN2.7 XS2_Perph2.31 | length 19.5
  Top Layer w0.3: P1_RPiCONN2.7@55.3,62.5 53.9,61.1 53.9,57.7 62.86,48.74 XS2_Perph2.31@62.86,47.285
DISPLAY.LCD.SPI.nCE_Perph3: XS2_Perph3.31
DISPLAY.LCD.SPI.nCE_Perph4: P1_RPiCONN4.7 XS2_Perph4.31 | length 19.4
  Top Layer w0.3: P1_RPiCONN4.7@55.2,134.5 54,133.3 54,129.6 62.86,120.74 XS2_Perph4.31@62.86,119.285
DISPLAY.LCD.SPI.nCE_Perph5: XS2_Perph5.31
DISPLAY.LCD.SPI.nCE_Perph6: XS2_Perph6.31
DISPLAY.LCD.SPI.nCE_Perph7: XS2_Perph7.31
DISPLAY.LCD.SPI.nCE_Perph8: P1_RPiCONN8.7 XS2_Perph8.31 | length 21
  Top Layer w0.3: v1(153.9,93.85) 153.9,93.9 153.1,94.7 153.1,94.749 153,94.849 153,97.4 P1_RPiCONN8.7@154.2,98.6 ; v1(154.89,87.99) 154.899,87.99 154.908,88 155.112,88 155.212,88.1 155.75,88.1 157.045,88.1 158.35,86.795 158.35,86.781 158.731,86.4 158.745,86.4 XS2_Perph8.31@161.86,83.285
  Bottom Layer w0.3: v1(153.9,93.85) 153.925,93.875 154.15,93.65 154.15,93.581 154.3,93.431 154.3,89.344 154.3,88.6 154.9,88 v1(154.89,87.99)
DISPLAY.LCD.SPI.nCE_Perph9: P1_RPiCONN9.11 XS2_Perph9.31 | length 17.1
  Top Layer w0.3: P1_RPiCONN9.11@159.3,134.3 158.1,133.1 158.1,128.7 161.86,124.94 XS2_Perph9.31@161.86,119.285
DISPLAY.LCD.SPI.nCE_Perph10: XS2_Perph10.31
DISPLAY.LCD.SPI.SCLK_Perph1: XS2_Perph1.36
DISPLAY.LCD.SPI.SCLK_Perph2: P1_RPiCONN2.8 XS2_Perph2.36 | length 20.5
  Top Layer w0.3: P1_RPiCONN2.8@55.24,59.985 55.24,59.16 66.7,47.7 66.7,47.3 66.7,45.985 XS2_Perph2.36@67.94,44.745
DISPLAY.LCD.SPI.SCLK_Perph3: XS2_Perph3.36
DISPLAY.LCD.SPI.SCLK_Perph4: P1_RPiCONN4.8 XS2_Perph4.36 | length 20.4
  Top Layer w0.3: P1_RPiCONN4.8@55.2,131.9 55.2,131.8 66.7,120.3 66.7,117.985 XS2_Perph4.36@67.94,116.745
DISPLAY.LCD.SPI.SCLK_Perph5: XS2_Perph5.36
DISPLAY.LCD.SPI.SCLK_Perph6: XS2_Perph6.36
DISPLAY.LCD.SPI.SCLK_Perph7: XS2_Perph7.36
DISPLAY.LCD.SPI.SCLK_Perph8: P1_RPiCONN8.8 XS2_Perph8.30 XS2_Perph8.36 | length 28.1
  Top Layer w0.3: P1_RPiCONN8.8@154.24,95.985 154.24,94.56 154.8,94 154.8,93.95 v1(154.8,93.85) ; v1(155.481,87.45) 155.481,87.435 155.481,87.4 157,87.4 160.6,83.8 160.6,82.025 XS2_Perph8.30@159.32,80.745 ; XS2_Perph8.30@159.237,80.663 160.3,79.6 161.379,79.6 161.384,79.595 162.336,79.595 162.341,79.6 163.5,79.6 163.919,79.6 163.924,79.595 164.876,79.595 164.881,79.6 165.795,79.6 XS2_Perph8.36@166.94,80.745
  Bottom Layer w0.3: v1(154.8,93.85) 154.8,89 155.2,88.6 155.6,88.2 155.6,87.6 155.458,87.458 155.474,87.443 v1(155.481,87.45)
DISPLAY.LCD.SPI.SCLK_Perph9: P1_RPiCONN9.14 XS2_Perph9.36 | length 17.1
  Top Layer w0.3: P1_RPiCONN9.14@161.9,131.8 161.9,128.5 165.7,124.7 165.7,117.985 XS2_Perph9.36@166.94,116.745
DISPLAY.LCD.SPI.SCLK_Perph10: XS2_Perph10.36
DISPLAY.SDCARD.nCE_Perph1: XS2_Perph1.32
DISPLAY.SDCARD.nCE_Perph2: P1_RPiCONN2.6 XS2_Perph2.32 | length 19.4
  Top Layer w0.3: P1_RPiCONN2.6@52.7,59.9 52.7,57.6 61.7,48.6 61.7,45.905 XS2_Perph2.32@62.86,44.745
DISPLAY.SDCARD.nCE_Perph3: XS2_Perph3.32
DISPLAY.SDCARD.nCE_Perph4: P1_RPiCONN4.6 XS2_Perph4.32 | length 19.5
  Top Layer w0.3: P1_RPiCONN4.6@52.7,132 P1_RPiCONN4.6@52.7,131.985 52.7,129.8 61.6,120.9 61.6,118.005 XS2_Perph4.32@62.86,116.745
DISPLAY.SDCARD.nCE_Perph5: XS2_Perph5.32
DISPLAY.SDCARD.nCE_Perph6: XS2_Perph6.32
DISPLAY.SDCARD.nCE_Perph7: XS2_Perph7.32
DISPLAY.SDCARD.nCE_Perph8: P1_RPiCONN8.6 XS2_Perph8.32 | length 23
  Top Layer w0.3: P1_RPiCONN8.6@151.9,95.8 151.9,95 v1(152.4,94.5) ; v1(161.06,86.64) 163.1,84.6 163.1,81.985 XS2_Perph8.32@161.86,80.745
  Bottom Layer w0.3: v1(152.4,94.5) 155.349,94.5 155.649,94.2 156.3,93.549 156.3,89.551 158.151,87.7 158.631,87.7 159.369,87.7 160,87.7 161,86.7 v1(161.06,86.64)
DISPLAY.SDCARD.nCE_Perph9: XS2_Perph9.32
DISPLAY.SDCARD.nCE_Perph10: XS2_Perph10.32
DISPLAY.TOUCH.IRQ_Perph1: XS2_Perph1.40
DISPLAY.TOUCH.IRQ_Perph2: P1_RPiCONN2.14 XS2_Perph2.40 | length 19.3
  Top Layer w0.3: P1_RPiCONN2.14@62.9,59.9 62.9,56.9 71.8,48 71.8,45.965 XS2_Perph2.40@73.02,44.745
DISPLAY.TOUCH.IRQ_Perph3: XS2_Perph3.40
DISPLAY.TOUCH.IRQ_Perph4: P1_RPiCONN4.14 XS2_Perph4.40 | length 19.4
  Top Layer w0.3: P1_RPiCONN4.14@62.9,132 62.9,130.3 69.9,123.3 70.9,122.3 71.8,121.4 71.8,117.965 XS2_Perph4.40@73.02,116.745
DISPLAY.TOUCH.IRQ_Perph5: XS2_Perph5.40
DISPLAY.TOUCH.IRQ_Perph6: XS2_Perph6.40
DISPLAY.TOUCH.IRQ_Perph7: XS2_Perph7.40
DISPLAY.TOUCH.IRQ_Perph8: XS2_Perph8.40
DISPLAY.TOUCH.IRQ_Perph9: P1_RPiCONN9.20 XS2_Perph9.40 | length 16.2
  Top Layer w0.3: P1_RPiCONN9.20@169.5,131.9 169.5,123.7 170.7,122.5 170.7,118.065 XS2_Perph9.40@172.02,116.745
DISPLAY.TOUCH.IRQ_Perph10: XS2_Perph10.40
DISPLAY.TOUCH.SPI.nCE_Perph1: XS2_Perph1.35
DISPLAY.TOUCH.SPI.nCE_Perph2: P1_RPiCONN2.5 XS2_Perph2.35 | length 26.5
  Top Layer w0.3: P1_RPiCONN2.5@52.7,62.525 51.5,61.325 51.5,57.2 v1(57.6,51.1) ; v1(64.3,51.1) 67.94,47.46 XS2_Perph2.35@67.94,47.285
  Bottom Layer w0.3: v1(57.6,51.1) v1(64.3,51.1)
DISPLAY.TOUCH.SPI.nCE_Perph3: XS2_Perph3.35
DISPLAY.TOUCH.SPI.nCE_Perph4: P1_RPiCONN4.5 XS2_Perph4.35 | length 26.6
  Top Layer w0.3: P1_RPiCONN4.5@52.7,134.5 51.4,133.2 51.4,130 v1(55.4,126) ; v1(62.2,126) 67.94,120.26 XS2_Perph4.35@67.94,119.285
  Bottom Layer w0.3: v1(55.4,126) v1(62.2,126)
DISPLAY.TOUCH.SPI.nCE_Perph5: XS2_Perph5.35
DISPLAY.TOUCH.SPI.nCE_Perph6: XS2_Perph6.35
DISPLAY.TOUCH.SPI.nCE_Perph7: XS2_Perph7.35
DISPLAY.TOUCH.SPI.nCE_Perph8: XS2_Perph8.35
DISPLAY.TOUCH.SPI.nCE_Perph9: P1_RPiCONN9.12 XS2_Perph9.35 | length 17.1
  Top Layer w0.3: P1_RPiCONN9.12@159.32,131.985 159.32,130.08 165,124.4 v1(165,122.5) ; XS2_Perph9.35@166.94,119.285 167,119.345 v1(167,122.5)
  Bottom Layer w0.3: v1(165,122.5) v1(167,122.5)
DISPLAY.TOUCH.SPI.nCE_Perph10: XS2_Perph10.35
ENCODER.CLK_Perph1: XS2_Perph1.12
ENCODER.CLK_Perph2: XS2_Perph2.12
ENCODER.CLK_Perph3: XS2_Perph3.12
ENCODER.CLK_Perph4: P1_RPiCONN4.22 XS2_Perph4.12 | length 47
  Top Layer w0.3: XS2_Perph4.12@37.46,116.745 38.7,117.985 38.7,120.2 39.8,121.3 v1(60,121.3) ; v1(73,125.5) 73.02,125.52 P1_RPiCONN4.22@73.02,131.985
  Bottom Layer w0.3: v1(60,121.3) 68.8,121.3 v1(73,125.5)
ENCODER.CLK_Perph5: XS2_Perph5.12
ENCODER.CLK_Perph6: P1_RPiCONN6.11 XS2_Perph6.12 | length 34.3
  Top Layer w0.3: XS2_Perph6.12@136.46,8.745 137.8,10.085 137.8,11.8 143.7,17.7 v1(155.9,17.7) ; v1(155.9,20.5) 158,22.6 158,25.3 P1_RPiCONN6.11@159.2,26.5
  Bottom Layer w0.3: v1(155.9,17.7) v1(155.9,20.5)
ENCODER.CLK_Perph7: XS2_Perph7.12
ENCODER.CLK_Perph8: XS2_Perph8.12
ENCODER.CLK_Perph9: XS2_Perph9.12
ENCODER.CLK_Perph10: XS2_Perph10.12
ENCODER.DT_Perph1: XS2_Perph1.11
ENCODER.DT_Perph2: XS2_Perph2.11
ENCODER.DT_Perph3: XS2_Perph3.11
ENCODER.DT_Perph4: P1_RPiCONN4.21 XS2_Perph4.11 | length 47.2
  Top Layer w0.3: XS2_Perph4.11@37.46,119.285 37.46,120.86 38.6,122 v1(59.3,122) ; v1(71.7,125.7) 71.7,133.2 P1_RPiCONN4.21@73,134.5
  Bottom Layer w0.3: v1(59.3,122) 68,122 v1(71.7,125.7)
ENCODER.DT_Perph5: XS2_Perph5.11
ENCODER.DT_Perph6: P1_RPiCONN6.14 XS2_Perph6.11 | length 31.8
  Top Layer w0.3: XS2_Perph6.11@136.46,11.285 143.575,18.4 158.1,18.4 161.9,22.2 P1_RPiCONN6.14@161.9,24
ENCODER.DT_Perph7: XS2_Perph7.11
ENCODER.DT_Perph8: XS2_Perph8.11
ENCODER.DT_Perph9: XS2_Perph9.11
ENCODER.DT_Perph10: XS2_Perph10.11
ENCODER.SW_Perph1: XS2_Perph1.10
ENCODER.SW_Perph2: XS2_Perph2.10
ENCODER.SW_Perph3: XS2_Perph3.10
ENCODER.SW_Perph4: P1_RPiCONN4.20 XS2_Perph4.10 | length 46.8
  Top Layer w0.3: XS2_Perph4.10@34.92,116.745 36.1,117.925 36.1,120.6 38.2,122.7 v1(58.5,122.7) ; v1(70.5,126.1) 70.5,127.6 P1_RPiCONN4.20@70.5,131.9
  Bottom Layer w0.3: v1(58.5,122.7) 67.1,122.7 v1(70.5,126.1)
ENCODER.SW_Perph5: XS2_Perph5.10
ENCODER.SW_Perph6: P1_RPiCONN6.13 XS2_Perph6.10 | length 37.8
  Top Layer w0.3: XS2_Perph6.10@133.92,8.745 135.2,10.025 135.2,11.8 142.4,19 157,19 160.5,22.5 160.5,25.3 P1_RPiCONN6.13@161.7,26.5
ENCODER.SW_Perph7: XS2_Perph7.10
ENCODER.SW_Perph8: XS2_Perph8.10
ENCODER.SW_Perph9: XS2_Perph9.10
ENCODER.SW_Perph10: XS2_Perph10.10
GND?: P1_RPiCONN9.15 R2.2 | length 29.6
  Top Layer w0.4: P1_RPiCONN9.15@164.4,134.525 165.7,133.225 165.7,131.3 v1(167.4,129.6) ; v1(172,111.4) 173.4,112.8 173.4,123.6 v1(172.6,124.4)
  Bottom Layer w0.4: v1(167.4,129.6) v1(172.6,124.4) ; R2.2@169.85,111.4 v1(172,111.4)
GYROSCOPE.CS_Perph1: XS1_Perph1.7
GYROSCOPE.CS_Perph2: XS1_Perph2.7
GYROSCOPE.CS_Perph3: XS1_Perph3.7
GYROSCOPE.CS_Perph4: XS1_Perph4.7
GYROSCOPE.CS_Perph5: P1_RPiCONN5.16 XS1_Perph5.7 | length 35.6
  Top Layer w0.3: XS1_Perph5.7@32.38,167.985 32.38,166.92 33.7,165.6 63.015,165.6 P1_RPiCONN5.16@65.4,167.985
GYROSCOPE.CS_Perph6: XS1_Perph6.7
GYROSCOPE.CS_Perph7: XS1_Perph7.7
GYROSCOPE.CS_Perph8: XS1_Perph8.7
GYROSCOPE.CS_Perph9: XS1_Perph9.7
GYROSCOPE.CS_Perph10: XS1_Perph10.7
GYROSCOPE.DR_Perph1: XS1_Perph1.6
GYROSCOPE.DR_Perph2: XS1_Perph2.6
GYROSCOPE.DR_Perph3: XS1_Perph3.6
GYROSCOPE.DR_Perph4: XS1_Perph4.6
GYROSCOPE.DR_Perph5: P1_RPiCONN5.13 XS1_Perph5.6 | length 35.7
  Top Layer w0.3: XS1_Perph5.6@29.84,170.525 29.84,171.74 31,172.9 60.485,172.9 P1_RPiCONN5.13@62.86,170.525
GYROSCOPE.DR_Perph6: XS1_Perph6.6
GYROSCOPE.DR_Perph7: XS1_Perph7.6
GYROSCOPE.DR_Perph8: XS1_Perph8.6
GYROSCOPE.DR_Perph9: XS1_Perph9.6
GYROSCOPE.DR_Perph10: XS1_Perph10.6
GYROSCOPE.INT_Perph1: XS1_Perph1.5
GYROSCOPE.INT_Perph2: XS1_Perph2.5
GYROSCOPE.INT_Perph3: XS1_Perph3.5
GYROSCOPE.INT_Perph4: XS1_Perph4.5
GYROSCOPE.INT_Perph5: P1_RPiCONN5.11 XS1_Perph5.5 | length 34.2
  Top Layer w0.3: XS1_Perph5.5@29.8,168.1 31.1,169.4 31.1,171.3 32,172.2 58.9,172.2 P1_RPiCONN5.11@60.5,170.6
GYROSCOPE.INT_Perph6: XS1_Perph6.5
GYROSCOPE.INT_Perph7: XS1_Perph7.5
GYROSCOPE.INT_Perph8: XS1_Perph8.5
GYROSCOPE.INT_Perph9: XS1_Perph9.5
GYROSCOPE.INT_Perph10: XS1_Perph10.5
GYROSCOPE.SDO_Perph1: XS1_Perph1.8
GYROSCOPE.SDO_Perph2: XS1_Perph2.8
GYROSCOPE.SDO_Perph3: XS1_Perph3.8
GYROSCOPE.SDO_Perph4: XS1_Perph4.8
GYROSCOPE.SDO_Perph5: P1_RPiCONN5.14 XS1_Perph5.8 | length 34.2
  Top Layer w0.3: XS1_Perph5.8@32.38,170.525 33.6,169.305 33.6,167.3 34.7,166.2 61.075,166.2 P1_RPiCONN5.14@62.86,167.985